# Altium PCB CW312T_ICE40UP.PcbDoc
Units mil, origin at the board's own origin, x right, y up, seen from the top; angles counter-clockwise.
Board outline 2310.04 x 1809.83 mil, 2 copper layers (Top Layer, Bottom Layer), stack 61.756 mil thick; 25 components, 50 nets, 174 pads, 65 vias.
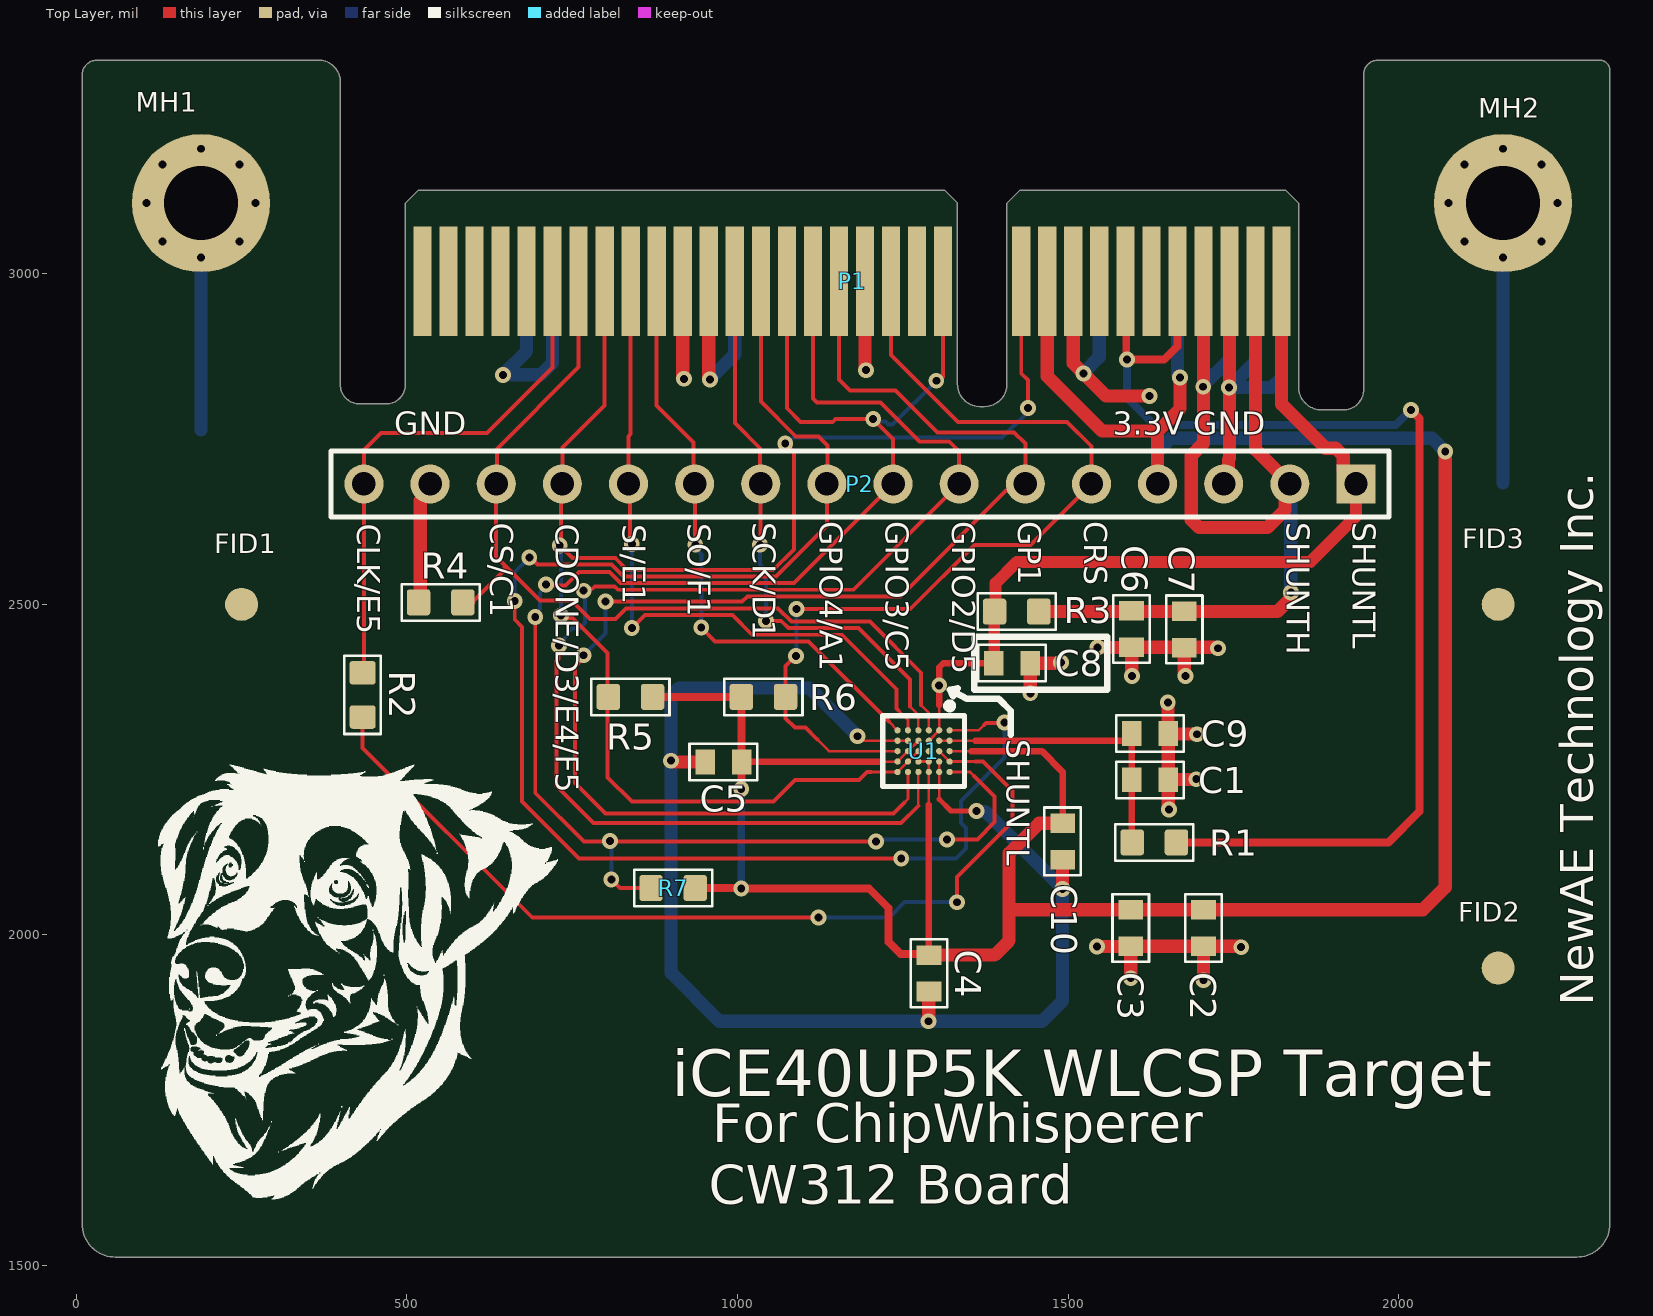
[diagram p0: Top Layer view]
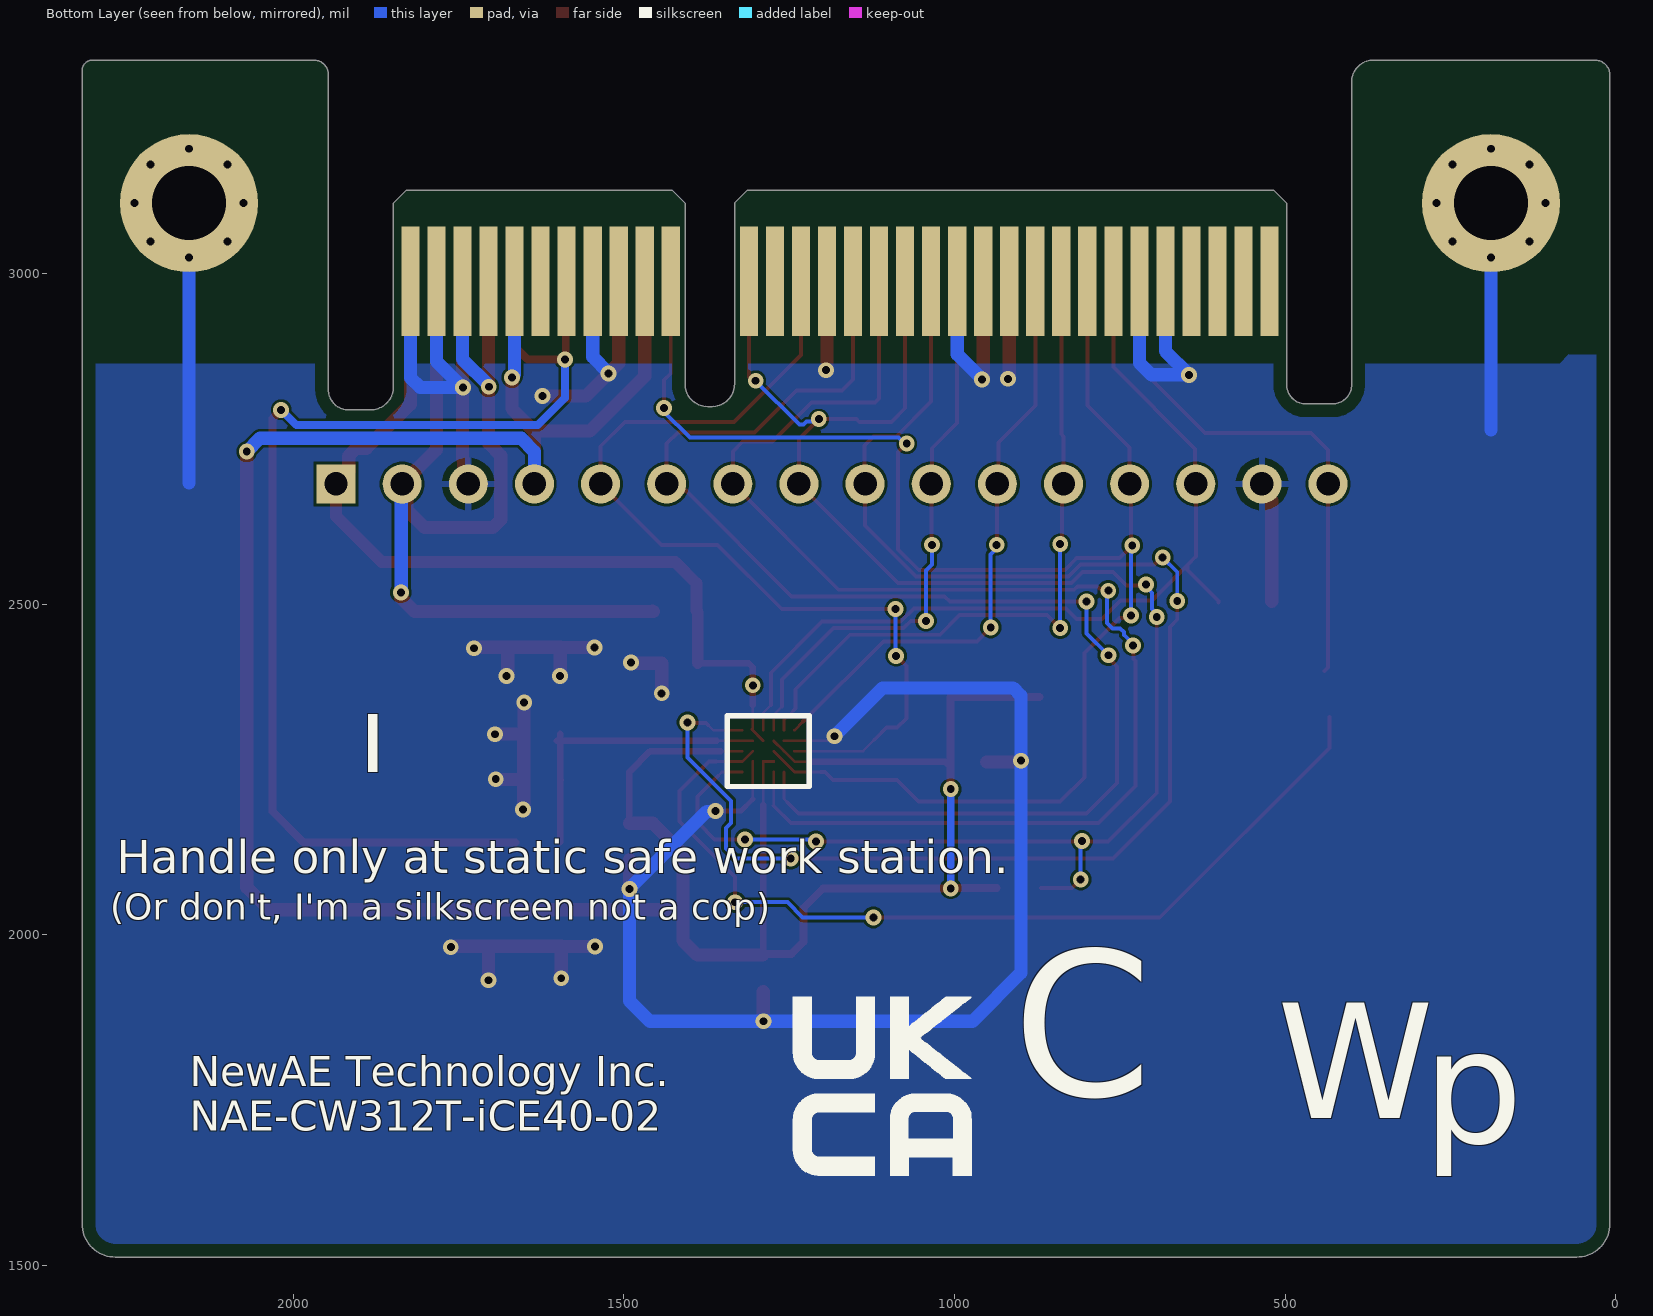
[diagram p1: Bottom Layer view, seen from below]
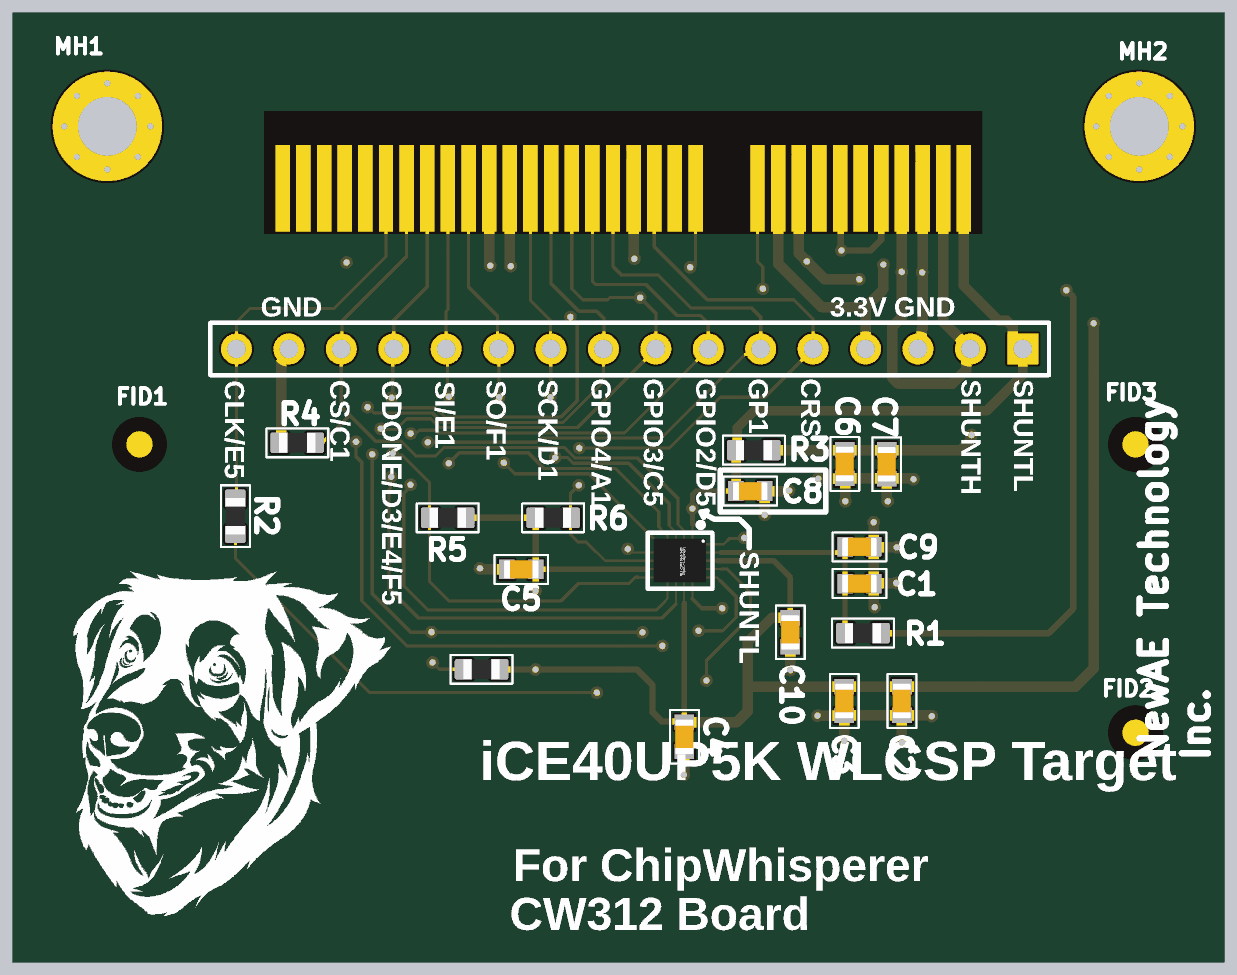
[diagram p2: 3D render of the assembled board from above, using the file's embedded part models]

## Layer stack, top to bottom
Top Solder: solder mask 1, SM-002, Dk 4
Top Layer: signal copper 1.378
Dielectric 1: core 59, Core-043, Dk 4.3
Bottom Layer: signal copper 1.378
Bottom Solder: solder mask 1, SM-002, Dk 4

## Board outline
58.86,1513 cw(c58.86,1563) 8.86,1563 8.86,3300.2 cw(c31.5,3300.2) 31.5,3322.83 366.14,3322.83 cw(c366.14,3289.65) 399.33,3289.65 399.33,2832.08 ccw(c428.41,2832.08) 428.41,2803 468.35,2803 ccw(c468.35,2832.4) 497.76,2832.4 497.76,3106.65 517.44,3126.34 1312.72,3126.34 1332.4,3106.65 1332.4,2833.03 ccw(c1366.43,2833.03) 1366.43,2799 1373.17,2799 ccw(c1373.17,2833.03) 1407.2,2833.03 1407.2,3106.65 1426.89,3126.34 1828.46,3126.34 1848.15,3106.65 1848.15,2829.02 ccw(c1883.17,2829.02) 1883.17,2794 1916.05,2794 ccw(c1916.05,2824.53) 1946.58,2824.53 1946.58,3300.91 cw(c1968.5,3300.91) 1968.5,3322.83 2303.15,3322.83 cw(c2303.15,3307.09) 2318.9,3307.09 2318.86,3307.09 2318.86,1562.96 2318.9,1563 cw(c2268.9,1563) 2268.9,1513

## Design rules (kind name [scope] priority, off if disabled: settings)
BoardOutlineClearance Silk_to_Outline [(OnLayer('Top Overlay'))] p1: gap=0 ignorepadtopadclearanceinfootprint=FALSE
BoardOutlineClearance [All] p2: gap=20 ignorepadtopadclearanceinfootprint=FALSE except(3.94: SMDPad-OutlineEdge SMDPad-CavityEdge SMDPad-CutoutEdge SMDPad-SplitBarrior SMDPad-SplitContinuation; 8: Track-OutlineEdge Track-CavityEdge Track-CutoutEdge Track-SplitBarrior Track-SplitContinuation)
Clearance [All] p1: gap=4 ignorepadtopadclearanceinfootprint=FALSE except(0: Arc-Hole Track-Hole SMDPad-Hole THPad-Hole Via-Hole Fill-Hole Poly-Hole Region-Hole Text-Hole)
HoleSize [All] p1: absolutevalues=TRUE maxlimit=200 minlimit=1 maxpercent=80.000 minpercent=20.000
MinimumSolderMaskSliver [All] p1: minsoldermaskwidth=5
PlaneConnect PlaneConnect_viaDirect [IsVia] p1: planeconnectstyle=Direct reliefexpansion=20 reliefentries=4 reliefconductorwidth=10 reliefairgap=10
PlaneConnect [All] p2: planeconnectstyle=Relief reliefexpansion=20 reliefentries=4 reliefconductorwidth=10 reliefairgap=10
PolygonConnect PolygonConnect_viaDirect [All vs isVia] p1: connectstyle=Direct reliefconductorwidth=10 reliefentries=4 polygonreliefangle="90 Angle" airgapwidth=10
PolygonConnect [All] p2: connectstyle=Relief reliefconductorwidth=10 reliefentries=4 polygonreliefangle="90 Angle" airgapwidth=10
RoutingVias [All] p1: holewidth=28 width=50 viastyle="Through Hole" minholewidth=12 minwidth=24 maxholewidth=100 maxwidth=500
SilkToSilkClearance [All] p1: silktosilkclearance=5
SilkToSolderMaskClearance [IsPad] p1: minsilkscreentomaskgap=5 clearancetoexposedcopper=TRUE
SolderMaskExpansion [All] p1: expansion=4 istentingtop=FALSE
Width [All] p1: maxlimit=100 minlimit=4 preferedwidth=8 minimp=50.000000 maximp=50.000000 favimp=50.000000
25 further rules are at their usual default settings.

## Classes and differential pairs
component class "Edge Connector": P1

## Components (designator, comment, footprint, x,y, rotation, side; value= is the part's Value field where it differs from the comment)
C1 "100n" CAPC0603_M 1623.44,2234.54 r0 top
C2 "2u2" CAPC0603_M 1704.44,2010.54 r270 top
C3 "100n" CAPC0603_M 1594.44,2010.54 r270 top
C4 "100n" CAPC0603_M 1289.44,1942.09 r270 top
C5 "100n" CAPC0603_M 978.44,2261.54 r180 top
C6 "2u2" CAPC0603_M 1595.44,2462.54 r270 top
C7 "100n" CAPC0603_M 1675.44,2462.09 r270 top
C8 "DNM" CAPC0603_M 1415,2411 r0 top
C9 "2u2" CAPC0603_M 1623.44,2304.54 r0 top
C10 "100n" CAPC0603_M 1491.44,2141.54 r270 top
FID1 "FIDU-ROUND-1.0MM" FIDU-ROUND-1.0mm#1 245,2501 r0 top
FID2 "FIDU-ROUND-1.0MM" FIDU-ROUND-1.0mm#2 2098,1916 r0 top
FID3 "FIDU-ROUND-1.0MM" FIDU-ROUND-1.0mm#3 2142,2540 r0 top
MH1 "4-40 MH, Tight Fit" MOUNT_#4_TIGHT 188.7,3106.65 r0 top
MH2 "4-40 MH, Tight Fit" MOUNT_#4_TIGHT 2157.2,3106.65 r0 top
P1 "PCIeX4-GF-2D-1000-1K-O64" PCIeX4-GF-2D-1000-1K-O64 1448.54,2988.54 r180 top
P2 "Header 16" HDR1X16 1935,2682 r180 top
R1 "100R" RESC1608X55N#1 1630,2140 r180 top
R2 "10R" RESC1608X55N#1 433,2363 r90 top
R3 "10R" RESC1608X55N#1 1422,2489 r180 top
R4 "1k" RESC1608X55N#2 551,2503 r0 top
R5 "1k" RESC1608X55N#1 838,2360 r180 top
R6 "1k" RESC1608X55N#1 1039,2360 r0 top
R7 "1k" RESC1608X55N#2 902.46,2071 r0 top
U1 "iCE40UP5K-UWG30ITR" FP-WLSC-30-MFG 1281.19,2277.96 r270 top

## Footprints (in the part's own frame and the unit in brackets; to place one, negate y for a bottom-side part, rotate by r counter-clockwise, add the part's x,y. Pads: shape width x height; smd on the part's side, far side on the other; paste and mask are expansions set on the pad)
CAPC0603_M [mm]
  rect 0.75x0.95 smd: 1(-0.7,0) 2(0.7,0)
  silkscreen extent -1.3,-0.7 1.3,0.7, body extent -0.85,-0.45 0.85,0.45, height 0.9
FIDU-ROUND-1.0mm#1 [mil]
  round 50 smd paste-78.74 mask+27.56: M1(5,-1)
FIDU-ROUND-1.0mm#2 [mil]
  round 50 smd paste-78.74 mask+27.56: M1(52,34)
FIDU-ROUND-1.0mm#3 [mil]
  round 50 smd paste-78.74 mask+27.56: M1(8,-40)
FP-WLSC-30-MFG [mm]
  round 0.24 smd paste+0 mask+0: A1(-0.8,1) A2(-0.4,1) A3(0,1) A4(0.4,1) A5(0.8,1) B1(-0.8,0.6) B2(-0.4,0.6) B3(0,0.6) B4(0.4,0.6) B5(0.8,0.6) C1(-0.8,0.2) C2(-0.4,0.2) C3(0,0.2) C4(0.4,0.2) C5(0.8,0.2) D1(-0.8,-0.2) D2(-0.4,-0.2) D3(0,-0.2) D4(0.4,-0.2) D5(0.8,-0.2) E1(-0.8,-0.6) E2(-0.4,-0.6) E3(0,-0.6) E4(0.4,-0.6) E5(0.8,-0.6) F1(-0.8,-1) F2(-0.4,-1) F3(0,-1) F4(0.4,-1) F5(0.8,-1)
  silkscreen extent -1.86,-1.57 1.36,1.57, body extent -1.57,-1.78 1.57,1.78, height 0.25
HDR1X16 [mm] "Connector; Header; 16 Position"
  rect 1.5x1.5 hole 0.9: 1(0,0)
  round 1.5 hole 0.9: 2(2.54,0) 3(5.08,0) 4(7.62,0) 5(10.16,0) 6(12.7,0) 7(15.24,0) 8(17.78,0) 9(20.32,0) 10(22.86,0) 11(25.4,0) 12(27.94,0) 13(30.48,0) 14(33.02,0) 15(35.56,0) 16(38.1,0)
  silkscreen extent -1.27,-1.27 39.37,1.27
MOUNT_#4_TIGHT [mil]
  round 14 hole 12: 1(-82.21,0) 1(-58.13,-58.13) 1(-58.13,58.13) 1(0,-82.21) 1(0,82.21) 1(0,82.21) 1(58.13,-58.13) 1(58.13,58.13) 1(82.21,0)
  round 208.66 hole 112.2: 1(0,0)
PCIeX4-GF-2D-1000-1K-O64 [mm] "Golden finger, PCIeX4, Dual, Opposite, Pitch 1mm, 64-Position"
  rect 0.7x4.2 smd far side paste-1: A1(-9.5,0) A2(-8.5,0) A3(-7.5,0) A4(-6.5,0) A5(-5.5,0) A6(-4.5,0) A7(-3.5,0) A8(-2.5,0) A9(-1.5,0) A10(-0.5,0) A11(0.5,0) A12(3.5,0) A13(4.5,0) A14(5.5,0) A15(6.5,0) A16(7.5,0) A17(8.5,0) A18(9.5,0) A19(10.5,0) A20(11.5,0) A21(12.5,0) A22(13.5,0) A23(14.5,0) A24(15.5,0) A25(16.5,0) A26(17.5,0) A27(18.5,0) A28(19.5,0) A29(20.5,0) A30(21.5,0) A31(22.5,0) A32(23.5,0)
  rect 0.7x4.2 smd paste-1: B1(-9.5,0) B2(-8.5,0) B3(-7.5,0) B4(-6.5,0) B5(-5.5,0) B6(-4.5,0) B7(-3.5,0) B8(-2.5,0) B9(-1.5,0) B10(-0.5,0) B11(0.5,0) B12(3.5,0) B13(4.5,0) B14(5.5,0) B15(6.5,0) B16(7.5,0) B17(8.5,0) B18(9.5,0) B19(10.5,0) B20(11.5,0) B21(12.5,0) B22(13.5,0) B23(14.5,0) B24(15.5,0) B25(16.5,0) B26(17.5,0) B27(18.5,0) B28(19.5,0) B29(20.5,0) B30(21.5,0) B31(22.5,0) B32(23.5,0)
RESC1608X55N#1 [mm] "Chip Resistor, Body 1.6x0.8mm, EIA 0603, IPC Medium Density"
  round 0.254 on Mech4: 0(0,0)
  rrect25% 0.9x1 smd: 1(-0.85,0) 2(0.85,0)
  Top Layer pour cut-out: -0.6,0.5 0.6,0.5 0.6,-0.5 -0.6,-0.5
  silkscreen extent -1.5,-0.7 1.5,0.7, body extent -0.87,-0.47 0.88,0.48, height 0.54
RESC1608X55N#2 [mm] "Chip Resistor, Body 1.6x0.8mm, EIA 0603, IPC Medium Density"
  round 0.254 on Mech15: 0(0,0)
  rrect25% 0.9x1 smd: 1(-0.85,0) 2(0.85,0)
  Top Layer pour cut-out: -0.6,0.5 0.6,0.5 0.6,-0.5 -0.6,-0.5
  silkscreen extent -1.5,-0.7 1.5,0.7, body extent -0.87,-0.47 0.88,0.48, height 0.54

## Part data
C1 C3 C4 C5 C7 C10: library part CCHIP-100n-0603, "100n, 0603", Case-EIA=0603, Case-Metric=1608, Manufacture 1=Kemet, Manufacture Part Number 1=C0603C104K5RACTU, Rated Voltage=50VDC, Supplier Part Number 1=399-5089-2-ND, Component Group=Capacitor, Component Type=Standard, Mounting Technology=SMT, Part Number=CCHIP-100n-0603, Pin Count=2, Supplier 1=Digi-Key
C2 C6 C9: library part CCHIP-2u2-0603, "2u2, 0603", Case-EIA=0603, Case-Metric=1608, Manufacture 1=Samsung, Manufacture Part Number 1=CL10B225KP8NNNC, Rated Voltage=10VDC, Supplier Part Number 1=1276-1134-1-ND, Component Group=Capacitor, Component Type=Standard, Mounting Technology=SMT, Part Number=CCHIP-2u2-0603, Pin Count=2, Supplier 1=Digi-Key
C8: library part CCHIP-DNM-0603, "DNM, 0603", Case-EIA=0603, Component Group=Capacitor, Component Type=Standard, Mounting Technology=SMT, Part Number=CCHIP-DNM-0603, Pin Count=2
FID1 FID2 FID3: "ROUND FIDUCIAL", Component Group="PCB Feature", Component Type="Standard (No BOM)", Part Number=FIDU-ROUND-1.0MM, Pin Count=0
MH1 MH2: library part MOUNT_#4_TIGHT, "Machine screw 4-40 Mounting Hole", Component Group=Mechanical, Component Type=Mechanical, Part Number=MOUNT_#4_TIGHT, Pin Count=1, PP Material Stack=0, PP Rotation=0
P1: library part CMP-0001-00031-2, "Golden finger, PCIeX4, Dual, Opposite, Pitch 1mm, 64-Position", ClassName="Edge Connector", Datasheet Version="rev2.0, Apr-2007", Mating Connector=Molex-87715-9106, Package Reference=PCIeX4-GF-2D-1000-1K-O64, Publisher=Altium
P2: "Header, 16-Pin", LatestRevisionDate=17-Jul-2002, LatestRevisionNote="Re-released for DXP Platform.", Publisher="Altium Limited"
R1: library part RCHIP-100R-0603, "100R res, 0603, 1%, 1/10W", Case-EIA=0603, Case-Metric=1608, Manufacture 1=Yageo, Manufacture Part Number 1=RC0603FR-07100RL, Rated Power=0.1W, Rated Voltage=75VDC, Supplier Part Number 1=311-100HRCT-ND, Temperature Range="-55C to 155C", Tolerance=1%, Component Group=Resistor, Component Type=Standard, Mounting Technology=SMT, Part Number=RCHIP-100R-0603, Pin Count=2, Supplier 1=Digi-Key
R2 R3: library part RCHIP-10R-0603, "10R res, 0603, 1%, 1/10W", Case-EIA=0603, Case-Metric=1608, Manufacture 1=Yageo, Manufacture Part Number 1=RC0603FR-0710RL, Rated Power=0.1W, Rated Voltage=75VDC, Supplier Part Number 1=311-10.0HRCT-ND, Temperature Range="-55C to 155C", Tolerance=1%, Component Group=Resistor, Component Type=Standard, Mounting Technology=SMT, Part Number=RCHIP-10R-0603, Pin Count=2, Supplier 1=Digi-Key
R4 R5 R6 R7: library part RCHIP-1K-0603, "1k res, 0603, 1%, 1/10W", Case-EIA=0603, Case-Metric=1608, Manufacture 1=Yageo, Manufacture Part Number 1=RC0603FR-071KL, Rated Power=0.1W, Rated Voltage=75VDC, Supplier Part Number 1=311-1.00KHRCT-ND, Temperature Range="-55C to 155C", Tolerance=1%, Component Group=Resistor, Component Type=Standard, Mounting Technology=SMT, Part Number=RCHIP-1K-0603, Pin Count=2, Supplier 1=Digi-Key
U1: library part CMP-17932-000002-1, "CE40-ULTRAPLUS, 5280 LUTS, 1.2V", Frequency=185MHz, Manufacturer="Lattice Semiconductor", Max Junction Temp=+100°C, Max Supply Voltage=3.46V, Min Supply Voltage=1.14V, Package=WLSC-30, Temperature="-40°C to +100°C", Temperature Range Low=-40°C, Automotive=No, Category=IC, ComponentLink2Description=Datasheet, ComponentLink2URL=http://www.latticesemi.com/view_document?document_id=51968, Device Class L1="Integrated Circuits (ICs)", Device Class L2="Embedded Processors and Controllers", Device Class L3="FPGAs - Field Programmable Gate Arrays", Digikey Description="CE40-ULTRAPLUS, 5280 LUTS, 1.2V", Footprint Url=http://www.latticesemi.com/view_document?document_id=213, Height=0.6mm, Ipc Land Pattern Name=BGA30N40P5X6_253X211X60, Lead Free=Yes, Manufacturer Part Number=iCE40UP5K-UWG30ITR, Number of I/Os=21, Number Of Logic Blocks=660, Number Of Logic Elements Cells=5280, Octopart=https://octopart.com/ice40up5k-uwg30itr-lattice+semiconductor-75367085, Propagation Delay=9ns, Ram Size=1024Kbits, RoHS=TRUE, Standoff Height=0.14mm, Temperature Range High=+100°C

## Via types
v1: diameter 24, hole 12, Top Layer to Bottom Layer, tented both sides, 64 vias
v2: diameter 24, hole 12, Top Layer to Bottom Layer, 1 vias

## Nets (pads, with @x,y where several pads share a name; then routed paths per layer and width w, separated by ;. In a path a pad name is that pad's centre, name@x,y a point inside that pad or via, vN(x,y) a via of type N, cw(c..) or ccw(c..) an arc to the next point about the centre after c; other vN are vias at no path point)
CDONE: P1.B11 P1.B25 P2.13 R5.2 U1.D3 U1.E4 U1.F5 | length 2470.5
  Top Layer w4: 1201.44,2246.46 U1.F5 U1.E4 U1.D3
  Top Layer w6: v1(733,2483) 736.44,2479.56 750.44,2479.56 803.54,2426.46 803.54,2238.46 840.46,2201.54 1054,2201.54 1087,2234.54 1183.44,2234.54 1195.37,2246.46 1201.44,2246.46 ; P1.B25 798.94,2800.94 735,2737 P2.13 733,2680 733,2591 v1(731,2589) 733.01,2589 733.01,2586.99 749.99,2570.01 814.99,2570.01 833,2552 1053.86,2552 1085,2583.14 1085,2730 v1(1072,2743) ; P1.B11 1428.86,2849.14 1439,2839 v1(1439,2797)
  Bottom Layer w6: v1(731,2589) 733,2587 v1(733,2483) ; v1(1072,2743) 1075.51,2743 1084.51,2752 1400,2752 1439,2791 v1(1439,2797)
CLK: R2.1 U1.A4 U1.B3 | length 1399.2
  Top Layer w4: U1.B3 U1.A4 1359.94,2262.21
  Top Layer w6: R2.1 433,2283 689.46,2026.54 v1(1122.44,2026.54) ; v1(1331.44,2049.54) 1331.44,2087.54 1415.44,2171.54 1415.44,2217.54 1370.76,2262.21 1359.94,2262.21
  Bottom Layer w6: v1(1122.44,2026.54) 1229.44,2026.54 1252.44,2049.54 v1(1331.44,2049.54)
CLKIN: P1.A29
CLKIN_n: P1.A30
CLKOUT: P1.B27 P2.16 R2.2 | length 803.7
  Top Layer w6: R2.2@440.54,2399 435,2404.54 P2.16 435,2733 461,2759 621,2759 720.2,2858.2 P1.B27
CLKOUT_n: P1.B28
CRST: P1.B14 P2.5 R6.2 U1.F3 | length 1415.2
  Top Layer w4: 1120.44,2295.54 1138.02,2277.96 U1.F3
  Top Layer w6: v1(1088,2422) 1072.46,2406.46 R6.2 1072.46,2327.54 1086.46,2313.54 1102.44,2313.54 1120.44,2295.54 ; v1(1089,2493) 1261,2493 1358,2590 1443,2590 P2.5 1535,2739 1498,2776 1333,2776 1232.01,2876.99 P1.B14
  Bottom Layer w6: v1(1088,2422) 1089,2423 v1(1089,2493)
CS: P1.B26 P2.14 R4.2 U1.C1 | length 1364.4
  Top Layer w4: 1277.44,2347.54 1289.07,2335.91 U1.C1
  Top Layer w6: R4.2@600.46,2503 600.46,2504.97 647.5,2552 647.5,2559.5 ; P1.B26 759.57,2858.57 636,2735 636,2683 P2.14 635,2572 647.5,2559.5 ; 1277.44,2347.54 1277.44,2396.54 1199.98,2474 1081.13,2474 1061.13,2494 831,2494 815,2478 777,2478 749,2506 701,2506 647.5,2559.5
FILT_HP: C6.1 C7.1 P1.A3 P1.B2 P1.B4 P2.2 R3.1 | length 1636.9
  Top Layer w20: R3.1@1456.46,2490 R3.1 1816,2489 1837,2510 v1(1837,2518) ; P1.B4 1704.45,2743.45 1686,2725 1686,2627.72 1697.72,2616 1801,2616 1827.53,2642.53 1827.53,2674.53 P2.2 1783.19,2733.81 P1.B2
  Bottom Layer w20: v1(1704,2829) 1704,2831 1743.82,2870.82 P1.A3 ; P2.2 1836.23,2680.77 1836.23,2518.77 v1(1837,2518)
FILTIN: P1.B5 P1.B7 R1.1 | length 1815.4
  Top Layer w12: P1.B7 1587.67,2987.21 1587.67,2871.33 v1(1589,2870) 1645,2870 1665.08,2890.08 P1.B5 ; R1.1 1984,2140 2031,2187 2031,2781 v1(2018,2794)
  Bottom Layer w12: v1(1589,2870) 1589,2812 1630,2771 1995,2771 v1(2018,2794)
GND: C1.2 C2.2 C3.2 C4.2 C5.2 C6.2 C7.2 C8.2 C9.2 C10.2 MH1.1 MH2.1 P1.A1 P1.A2 P1.A8 P1.A20 P1.A27 P1.A28 P1.B3 P1.B9 P1.B15 P1.B21 P1.B22 P2.3 P2.15 R4.1 U1.B4 U1.B5 U1.E2 U1.F2 | length 6033.9
  Top Layer w4: v1(1181.44,2300.54) 1181.44,2297.54 1185.27,2293.71 U1.F2 U1.E2 ; 1304.81,2205.16 U1.B5 U1.B4
  Top Layer w8: 1304.81,2205.16 1322.44,2187.54 v1(1361.44,2187.54)
  Top Layer w12: v1(899.44,2263.54) v1@901.44,2261.54
  Top Layer w20: R4.1@520,2504.47 520,2656.43 535,2671.43 P2.15 ; v1(899.44,2263.54) 900.52,2263.54 902.52,2261.54 C5.2 ; P1.B22 917.05,2842.95 v1(919,2841) ; P1.B21 956.42,2842.66 958,2841.08 v1(958,2840) ; P1.B15 1192.64,2856.44 1194,2855.08 v1(1194,2854) ; v1(1288.44,1869.54) 1288.94,1870.04 1288.94,1914.04 C4.2 ; v1(1442.56,2365.44) C8.2 1488,2411 v1(1489,2412) ; v1(1491.44,2069.54) C10.2 ; P1.B9 1507.6,2864.4 v1(1523,2849) 1557,2815 v1(1623,2815) ; v1(1543.44,1982.54) 1543.66,1982.76 1594.22,1982.76 C3.2 ; v1(1544.44,2434.54) 1544.66,2434.76 1595.22,2434.76 C6.2 ; v1(1594.44,1934.54) C3.2 ; v1(1596.44,2391.54) 1595.94,2392.04 1595.94,2434.48 C6.2 ; v1(1650.44,2351.54) 1650.72,2351.26 1650.72,2304.81 C9.2 ; v1(1652.44,2189.54) 1652.44,2190.62 1651,2192.06 C1.2 ; C7.2 1675.44,2394.62 1677.44,2392.62 v1(1677.44,2391.54) ; v1(1693.44,2235.54) 1692.94,2235.04 1651.5,2235.04 C1.2 ; v1(1694.44,2303.54) 1693.94,2304.04 1651.5,2304.04 C9.2 ; v1(1704.44,1931.54) C2.2 ; v1(1726.44,2433.54) 1725.36,2433.54 1723.92,2434.98 C6.2 ; P2.3 1742.09,2689.09 1742.09,2719.09 1743.82,2720.82 P1.B3 ; v1(1761.44,1981.54) 1760.36,1981.54 1758.92,1982.98 C2.2 ; C3.2 C2.2 ; C1.2 C9.2
  Bottom Layer w20: 188.7,2763.7 188.7,3024.45 MH1.1@188.7,3106.65 ; P1.A28 680.83,2882.83 v1(645,2847) 702,2847 720.2,2865.2 P1.A27 ; v1(958,2840) 995.79,2877.79 P1.A20 ; v1(1181.44,2300.54) 1108.44,2373.54 911.16,2373.54 899.44,2361.82 v1(899.44,2263.54) 899.44,1942.54 972.44,1869.54 v1(1288.44,1869.54) 1460.44,1869.54 1491.44,1900.54 v1(1491.44,2069.54) 1374.21,2186.77 1362.21,2186.77 v1(1361.44,2187.54) ; v1(1523,2849) 1523,2850.08 1546.97,2874.05 P1.A8 ; v1(1743,2828) v1@1744,2828 ; P1.A2 1783.19,2867.19 v1@1744,2828 ; P1.A1 1822.56,2842.56 1808,2828 v1@1744,2828 ; 2157.2,2683.8 2157.2,3024.45 MH2.1@2157.2,3106.65
GPIO1: P1.B16 P2.6 U1.E5 | length 2105.8
  Top Layer w4: 1252.44,2200.54 1257.57,2205.67 U1.E5
  Top Layer w6: v1(767,2423) 767,2419.3 754,2406.3 754,2229.98 799.98,2184 1235.91,2184 1252.44,2200.54 ; v1(800,2504) 1006.76,2504 1014.76,2512 1246,2512 1405.85,2671.85 1424.85,2671.85 P2.6 1435,2743 1418,2760 1302,2760 1239,2823 1170,2823 1153.27,2839.73 P1.B16
  Bottom Layer w6: v1(767,2423) 800,2456 v1(800,2504)
GPIO2: P1.B17 P2.7 U1.D5 | length 2072.8
  Top Layer w4: 1273.32,2195.41 U1.D5
  Top Layer w6: v1(730,2438) 729,2437 729,2417 726,2414 726,2225 782,2169 1246.91,2169 1273.32,2195.41 ; v1(767.26,2520.61) 770.18,2523.52 780.65,2523.52 784.13,2527 813.85,2527 818.85,2522 1175,2522 P2.7 1335,2731 1320,2746 1275,2746 1216,2805 1120,2805 1113.9,2811.1 P1.B17
  Bottom Layer w6: v1(730,2438) 730,2440.21 743.75,2453.95 743.75,2458.2 749.23,2463.68 760.68,2463.68 769,2472 769,2518.87 v1(767.26,2520.61)
GPIO3: P1.B12 P1.B18 P2.8 R7.1 U1.A5 | length 2634.9
  Top Layer w4: U1.A5 1351.51,2246.46 1357.44,2240.54
  Top Layer w6: v1(694,2481) 694,2215 767.46,2141.54 v1(1209.44,2141.54) ; v1(710,2530) 711.56,2528.44 739.44,2528.44 760,2549 805.99,2549 822.99,2532 1085,2532 P2.8 1235,2750 v1(1205,2780) 1147.84,2780 1143.84,2776 1095,2776 1074.53,2796.47 P1.B18 ; v1(809,2084) 822,2071 R7.1 ; v1(1300.4,2838) 1305,2838 1310.75,2843.75 P1.B12 ; v1(1316.44,2144.54) 1362.44,2144.54 1388.44,2170.54 1388.44,2209.54 1357.44,2240.54
  Bottom Layer w6: v1(694,2481) 694,2485.87 701,2492.87 701,2517.49 710,2526.49 v1(710,2530) ; v1(807,2142) 809,2140 v1(809,2084) ; v1(1205,2780) 1208.44,2776.56 1223.85,2776.56 1228.4,2772 1234.4,2772 v1(1300.4,2838) ; v1(1209.44,2141.54) 1212.44,2144.54 v1(1316.44,2144.54)
GPIO4: P1.B19 P2.9 U1.A1 | length 2331.3
  Top Layer w4: U1.A1 1364.36,2309.46 1372.46,2317.56
  Top Layer w6: v1(663,2505) 663,2477 674,2466 674,2202 760.46,2115.54 v1(1247.44,2115.54) ; v1(685,2571) 686.52,2571 697.51,2560.01 809.12,2560.01 827.13,2542 1058,2542 1135,2619 P2.9 1136,2683 1136,2740 1122,2754 1087.87,2754 1035.16,2806.71 P1.B19 ; 1372.46,2317.56 1375.44,2320.54 1402.44,2320.54 v1(1403.44,2321.54)
  Bottom Layer w6: v1(663,2505) 663,2549 v1(685,2571) ; v1(1247.44,2115.54) 1330.44,2115.54 1345.44,2130.54 1345.44,2161.54 1337.44,2169.54 1337.44,2202.54 1403.44,2268.54 v1(1403.44,2321.54)
HDR1: P1.A9
HDR2: P1.A10
HDR3: P1.A11
HDR4: P1.A12
HDR5: P1.A13
HDR6: P1.A14
HDR7: P1.A15
HDR8: P1.A16
HDR9: P1.A17
HDR10: P1.A18
IOVREF: C2.1 C3.1 C4.1 C5.1 C10.1 P1.A5 P1.B10 P2.4 R5.1 R6.1 R7.2 U1.A3 U1.C4 U1.C5 U1.D2 U1.D4 U1.E3 U1.F4 | length 4565.8
  Top Layer w4: 1213.19,2261.96 1241.57,2261.96 U1.E3 U1.D2 ; U1.D4 U1.C4 U1.C5 1289.07,2196.83 ; U1.A3 1353.19,2277.96
  Top Layer w10: C5.1@1007,2254.54 1014.43,2261.96 1213.19,2261.96 ; 1289.07,2196.83 1289.07,1970.03 C4.1 ; 1353.19,2277.96 1460.02,2277.96 1491.44,2246.54 C10.1
  Top Layer w12: R5.1 R6.1 1005.77,2359.77 1005.77,2261.77 C5.1 1006,2227.09 1005.44,2226.54 v1(1005.44,2220.54) ; R7.2 936.16,2070.77 1005.21,2070.77 v1(1005.44,2070.54) 1198.44,2070.54 1228.44,2040.54 1228.44,1989.54 1246.44,1971.54 1287.56,1971.54 C4.1@1289.07,1970.03
  Top Layer w20: C4.1 1388.56,1969.65 1410.44,1991.54 1410.44,2032 ; P1.B10 1468.23,2844.77 1551,2762 1635,2762 ; C10.1 1491.22,2168.87 1455.78,2168.87 1410.44,2123.54 1410.44,2032 ; P2.4 1635,2762 ; v1(1669,2843) 1669,2796 1635,2762 ; v1(2070,2731) 2070,2072 2036.09,2038.09 C2.1 C3.1 1416.54,2038.09 1410.44,2032
  Bottom Layer w12: v1(1005.44,2070.54) v1(1005.44,2220.54)
  Bottom Layer w20: P2.4 1635,2731 1655,2751 2050,2751 v1(2070,2731) ; P1.A5 1665.08,2848 1669,2844.08 v1(1669,2843)
JTAG_nRST: P1.A31
JTAG_TCK: P1.B32
JTAG_TDI: P1.B29
JTAG_TDO: P1.B30
JTAG_TMS: P1.B31
JTAG_TRST: P1.A32
JTAG_VREF: P1.A26
LED3: P1.B13
nRST_OUT: P1.A19
SCK: P1.B20 P2.10 U1.D1 | length 870.4
  Top Layer w4: 1260.44,2345.54 1273.32,2332.66 U1.D1
  Top Layer w6: P1.B20 995.79,2774.21 1034,2736 1034,2683 P2.10 1034.5,2681.5 1034.5,2590.5 v1(1034,2590) ; v1(1043,2475) 1065.99,2475 1076.99,2464 1182.98,2464 1260.44,2386.54 1260.44,2345.54
  Bottom Layer w6: v1(1034,2590) 1034,2560.13 1043,2551.13 v1(1043,2475)
SHUNTL: C8.1 P1.B1 P2.1 R3.2 U1.B1 U1.C2 | length 1324.6
  Top Layer w4: U1.C2 U1.B1@1306.19,2310.83 ; U1.B1 1304.81,2347.67
  Top Layer w10: 1304.81,2347.67 v2(1304.81,2377.54) 1304.81,2404.81 1311,2411 C8.1 C8.1@1387.99,2411.55 ; R3.2@1387.99,2488.45 R3.2 R3.2@1390,2490.46
  Top Layer w18: C8.1@1387.99,2411.55 R3.2@1387.99,2488.45 ; R3.2@1390,2490.46 1390,2532 1422,2564 1866,2564 1935,2633 P2.1
  Top Layer w20: P1.B1 1822.56,2802.44 1889,2736 1904.09,2736 1915.8,2724.28 1915.8,2701.2 P2.1
SI: P1.B24 P2.12 U1.E1 | length 1052.5
  Top Layer w4: 1243.44,2339.54 1257.57,2325.41 U1.E1
  Top Layer w6: P1.B24 838.31,2757.31 835,2754 P2.12 837.5,2679.5 837.5,2593.5 v1(840,2591) ; v1(840,2464) 860,2484 992,2484 1022,2454 1157.98,2454 1240.44,2371.54 1240.44,2342.54 1243.44,2339.54
  Bottom Layer w6: v1(840,2464) v1(840,2591)
SO: P1.B23 P2.11 U1.F1 | length 913.1
  Top Layer w4: 1228.74,2322.54 U1.F1
  Top Layer w6: P1.B23 877.68,2800.32 933,2745 933,2684 935.5,2681.5 935.5,2590.5 v1(936,2590) ; v1(945,2465) 966,2444 1107.28,2444 1228.74,2322.54
  Bottom Layer w6: v1(936,2590) 936,2585.13 945.5,2575.63 945.5,2465.5 v1(945,2465)
TRACECLK: P1.A21
TRACED0: P1.A22
TRACED1: P1.A23
TRACED2: P1.A24
TRACED3: P1.A25
VCC1.0: P1.B6
VCC1.8: P1.B8
VCC2.5: P1.A4
VCC5.0: P1.A6
VCCADJ: P1.A7
VCCPLL: C1.1 C9.1 R1.2 U1.A2 U1.B2 | length 461.9
  Top Layer w4: U1.B2 U1.A2 1359.44,2293.71
  Top Layer w10: 1359.44,2293.71 C9.1@1595.88,2293.71 ; C1.1@1595.05,2233.71 C1.1 ; R1.2@1595.88,2140 C1.1 ; C9.1 C9.1@1595.88,2293.71 ; C9.1@1601.05,2293.71 C9.1@1595.88,2293.71 ; C1.1 C9.1@1595.88,2293.71
pads on no net: FID1.M1 FID2.M1 FID3.M1 R1.0 R2.0 R3.0 R4.0 R5.0 R6.0 R7.0 U1.C3

## Polygon pours and split planes (outlines as drawn)
GND on Bottom Layer "GND_L02_P000" (solid, remove dead copper, pour order 0): 71,2878 85,2864 2329,2864 2405,2788 2405,1499 1,1499 -140,1640 -111,1669 -111,2874

## Other copper
Multi-Layer:
  pour cut-out: 1219.44,2331.54 1343.44,2331.54 1343.44,2225.54 1342.44,2224.54 1223.44,2224.54

## Silkscreen, mask and mechanical layers (free items; w line width, h text height)
Top Overlay:
  drawing of 48 lines, arcs and shapes, not listed
  text "GND" at 481,2744 h60
  text "3.3V" at 1567,2744 h60
  text "GND" at 1689,2744 h60
  text "GPIO4/A1" at 1112.25,2625.75 h60 r270
  text "GPIO3/C5" at 1212.25,2625.75 h60 r270
  text "GPIO2/D5" at 1312.25,2625.75 h60 r270
  text "GP1" at 1412.25,2625.75 h60 r270
  text "CRS" at 1512.25,2625.75 h60 r270
  text "SCK/D1" at 1010.75,2624.25 h60 r270
  text "SHUNTH" at 1818,2624 h60 r270
  text "SHUNTL" at 1918,2624 h60 r270
  text "CS/C1" at 614,2623 h60 r270
  text "SO/F1" at 912.25,2622.75 h60 r270
  text "CLK/E5" at 413,2622 h60 r270
  text "CDONE/D3/E4/F5" at 713,2622 h60 r270
  text "SI/E1" at 814.25,2620.75 h60 r270
  text "SHUNTL" at 1395,2296 h60 r270
  text "NewAE Technology Inc." at 2294,1893 h50 r90
  text "iCE40UP5K WLCSP Target" at 900.6,1732.73 h120
  text "For ChipWhisperer" at 962,1667 h100
  text "CW312 Board" at 956,1574 h100
Bottom Overlay:
  drawing of 8 lines, arcs and shapes, not listed
  text "i" at 1901.54,2207.98 h200
  text "Handle only at static safe work station." at 2266.54,2092.98 h50
  text "(Or don't, I'm a silkscreen not a cop)" at 2276.54,2022.98 h40
  text "NewAE Technology Inc. / NAE-CW312T-iCE40-02" at 2156.54,1703.78 h45
  text "C" at 911.54,1671.02 h450
  text "W" at 511.54,1665.62 h300
  text "p" at 291.54,1627.98 h300
Mechanical 1:
  lines w3.94: 8.86,3258.54 8.86,3300.2 cw(c31.5,3300.2) 31.5,3322.83 366.14,3322.83 cw(c366.14,3289.65) 399.33,3289.65 399.33,2900.1 399.33,2832.08 ; 497.76,2832.4 497.76,2900.1 497.76,3106.65 517.44,3126.34 1312.72,3126.34 1332.4,3106.65 1332.4,2833.03 ; 1407.2,2833.03 1407.2,3106.65 1426.89,3126.34 1828.46,3126.34 1848.15,3106.65 1848.15,2901.44 1848.15,2829.02 ; 1946.58,2824.53 1946.58,3300.91 cw(c1968.5,3300.91) 1968.5,3322.83 2303.15,3322.83 cw(c2303.15,3307.09) 2318.9,3307.09 ; 2318.86,3273.54 ccw(c2318.86,3273.58) 2318.9,3273.58
  lines w3.97: 8.86,3258.54 8.86,1563 ccw(c58.86,1563) 58.86,1513 893,1513 2268.9,1513 ccw(c2268.9,1563) 2318.9,1563 ; 399.33,2832.08 ccw(c428.41,2832.08) 428.41,2803 468.35,2803 ccw(c468.35,2832.4) 497.76,2832.4 ; 1332.4,2833.03 ccw(c1366.43,2833.03) 1366.43,2799 1373.17,2799 ccw(c1373.17,2833.03) 1407.2,2833.03 ; 1848.15,2829.02 ccw(c1883.17,2829.02) 1883.17,2794 1916.05,2794 ccw(c1916.05,2824.53) 1946.58,2824.53 ; 2318.86,1562.96 2318.86,3307.09